# Altium PCB dental-uint-pedal v1_0.PcbDoc
Units mm, origin at the board's own origin, x right, y up, seen from the top; angles counter-clockwise.
Board outline 48.02 x 53.5 mm, 2 copper layers (Top Layer, Bottom Layer), stack 0.571 mm thick; 57 components, 41 nets, 198 pads, 201 vias.
Unrouted connection lines stored in the file: 1.
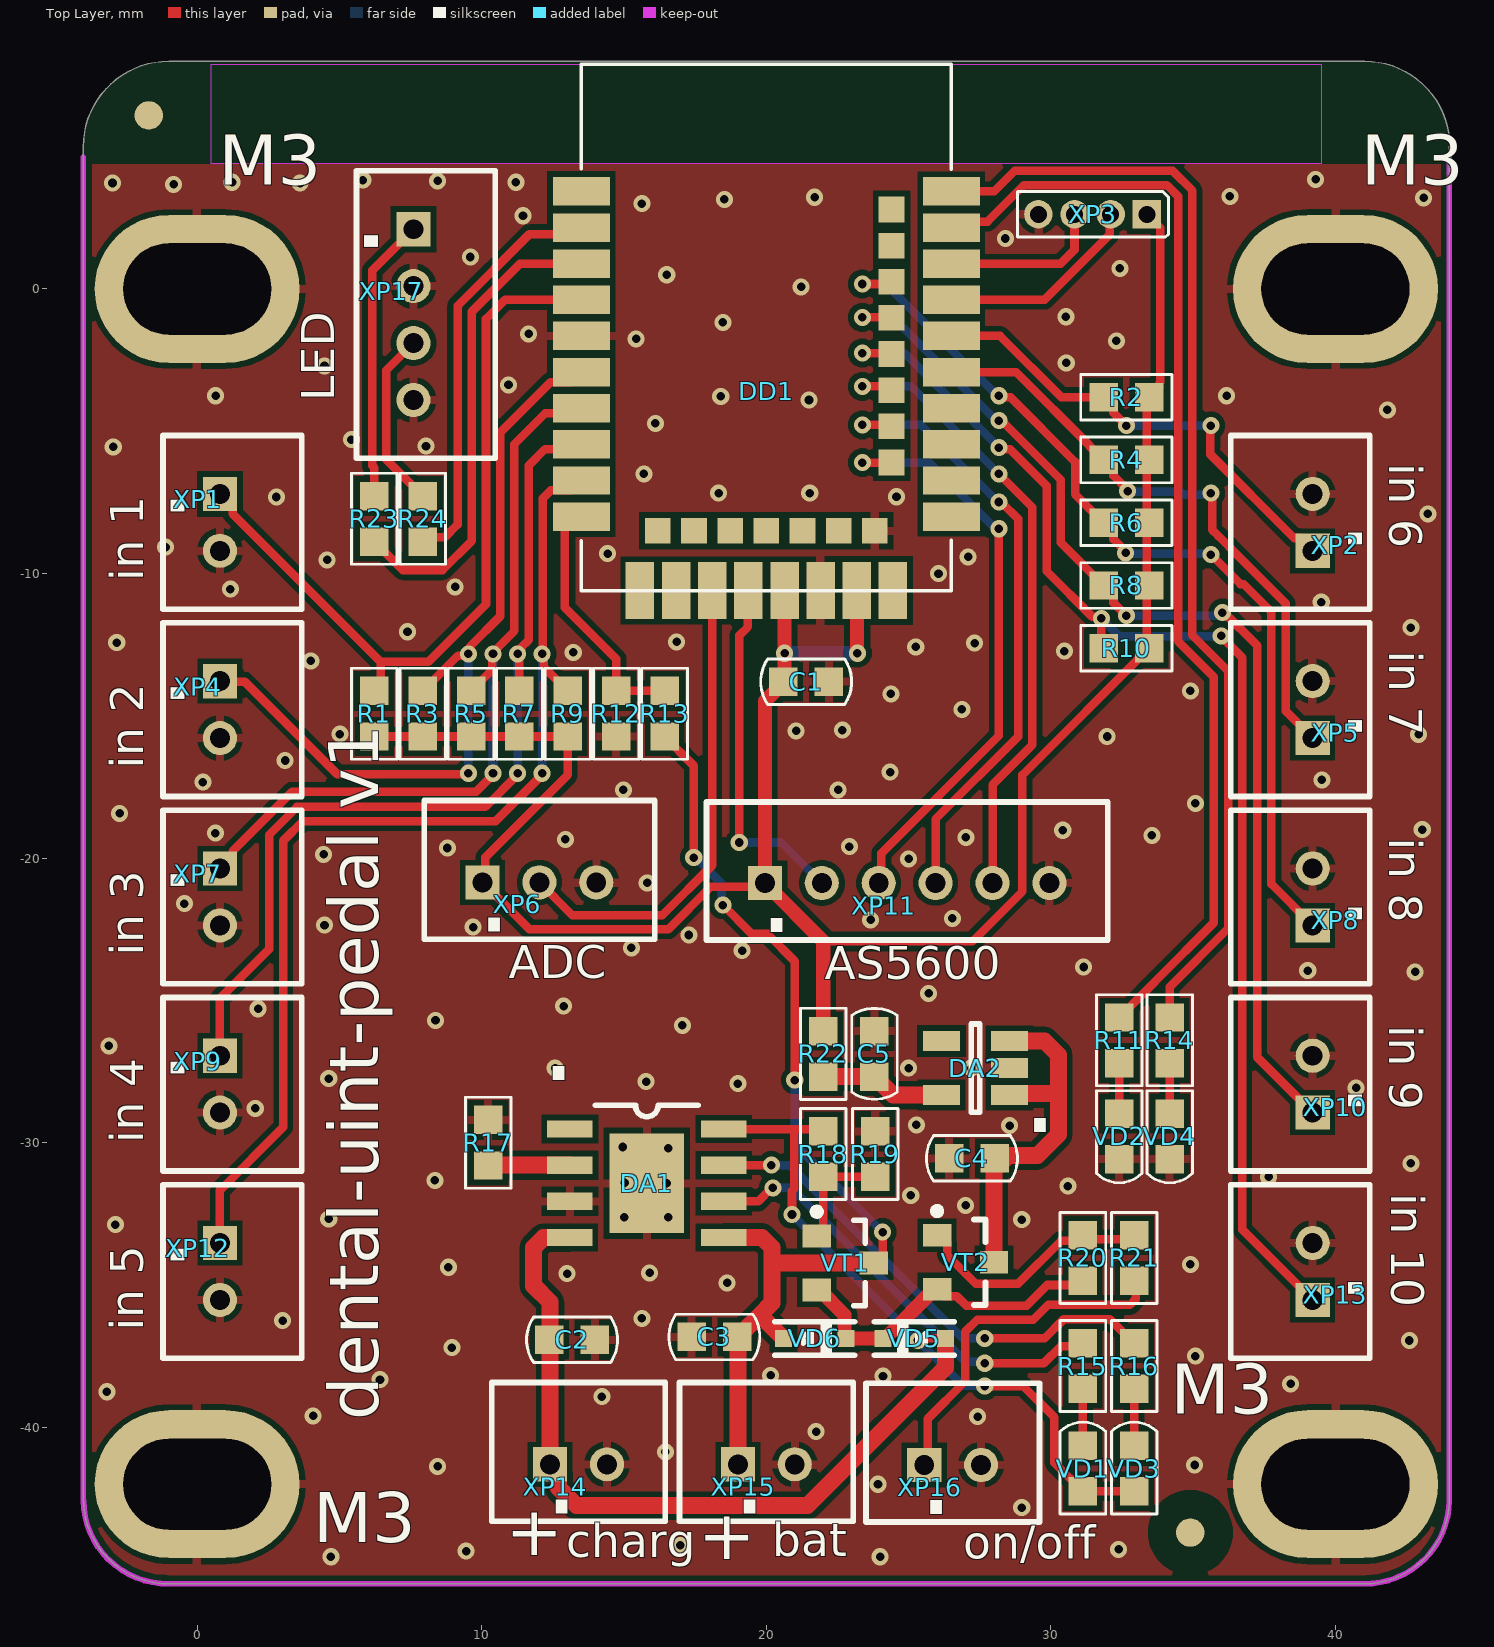
[diagram p0: Top Layer view]
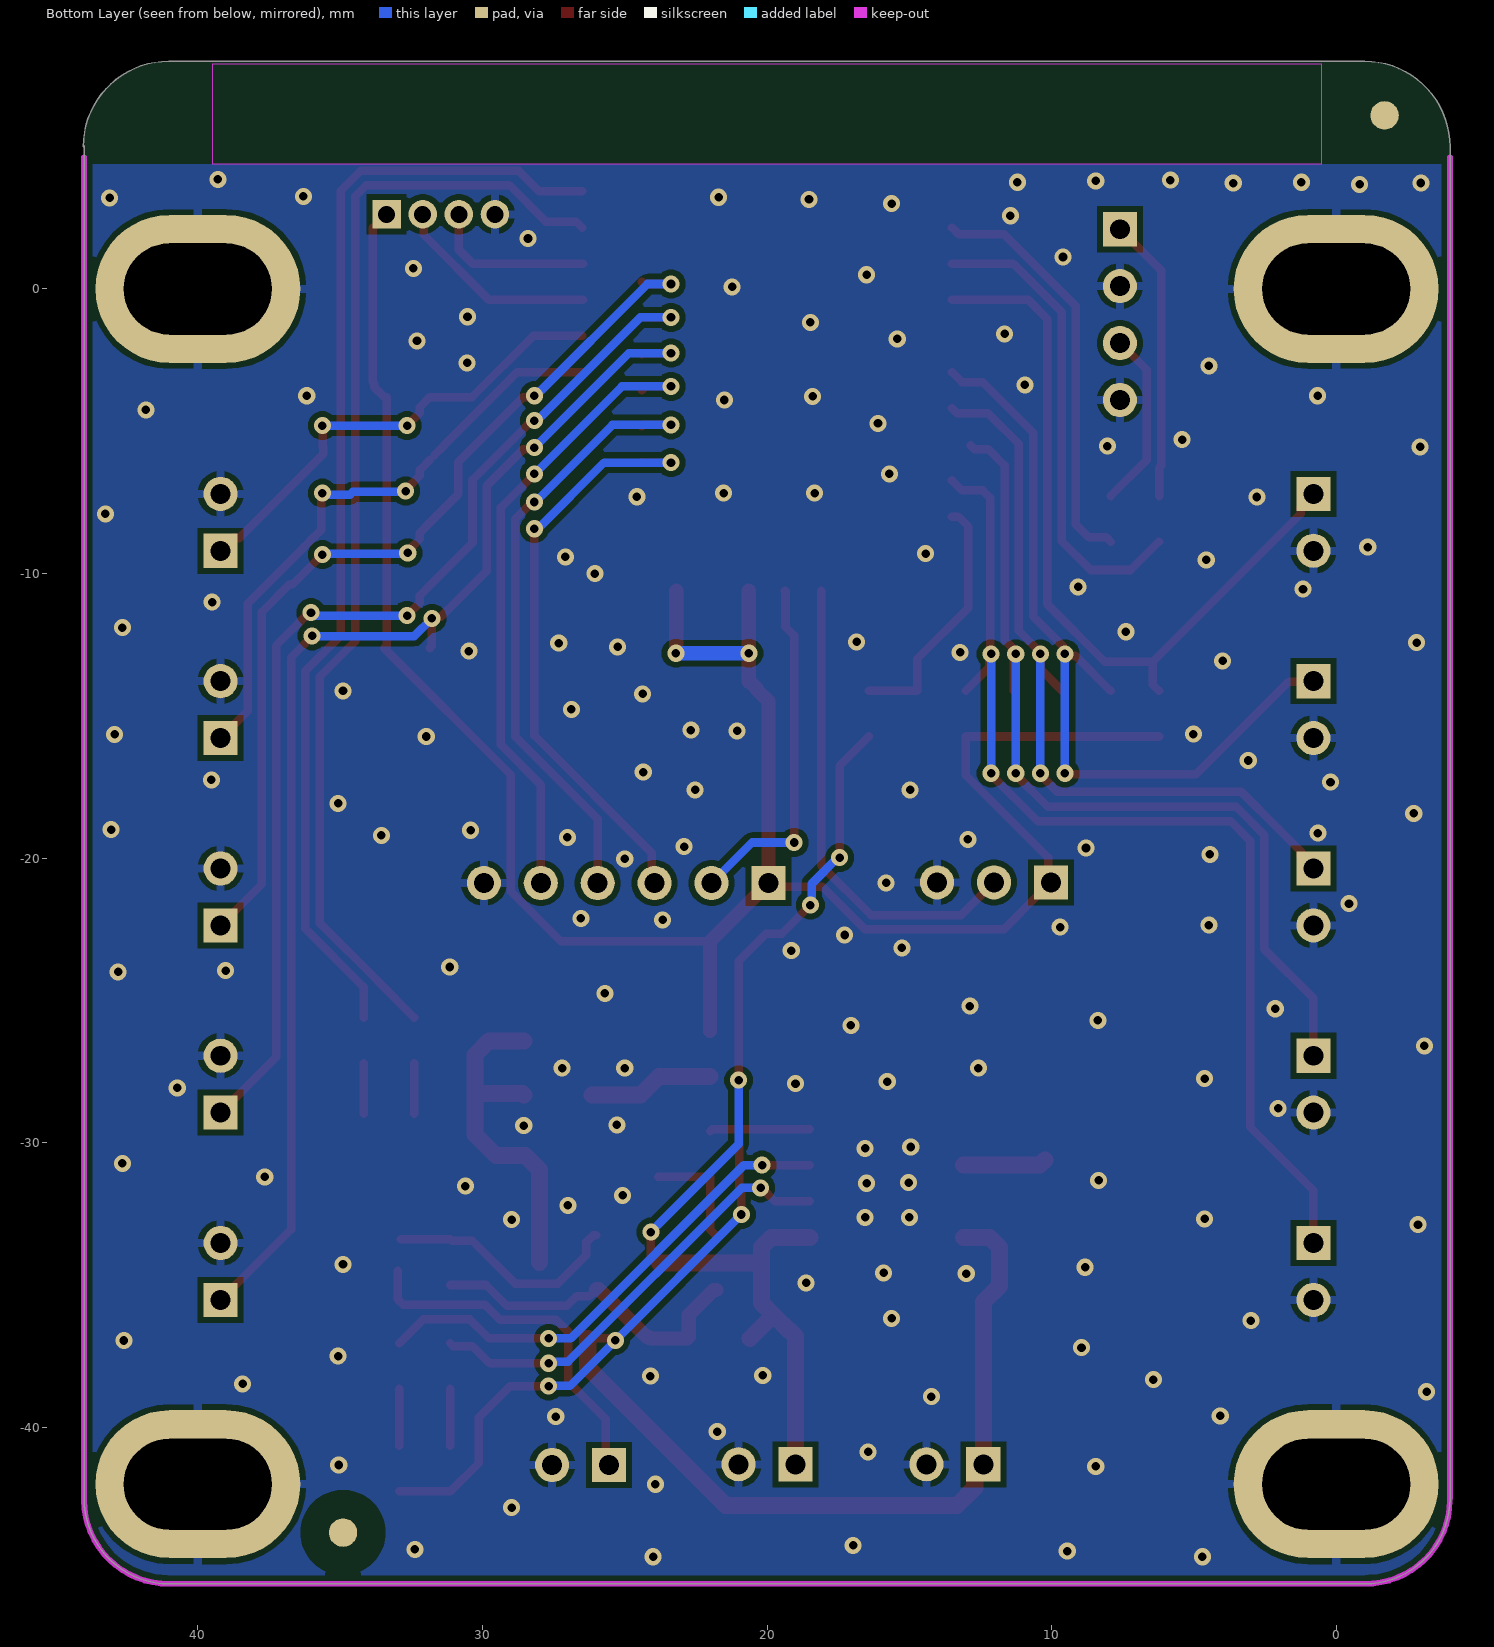
[diagram p1: Bottom Layer view, seen from below]
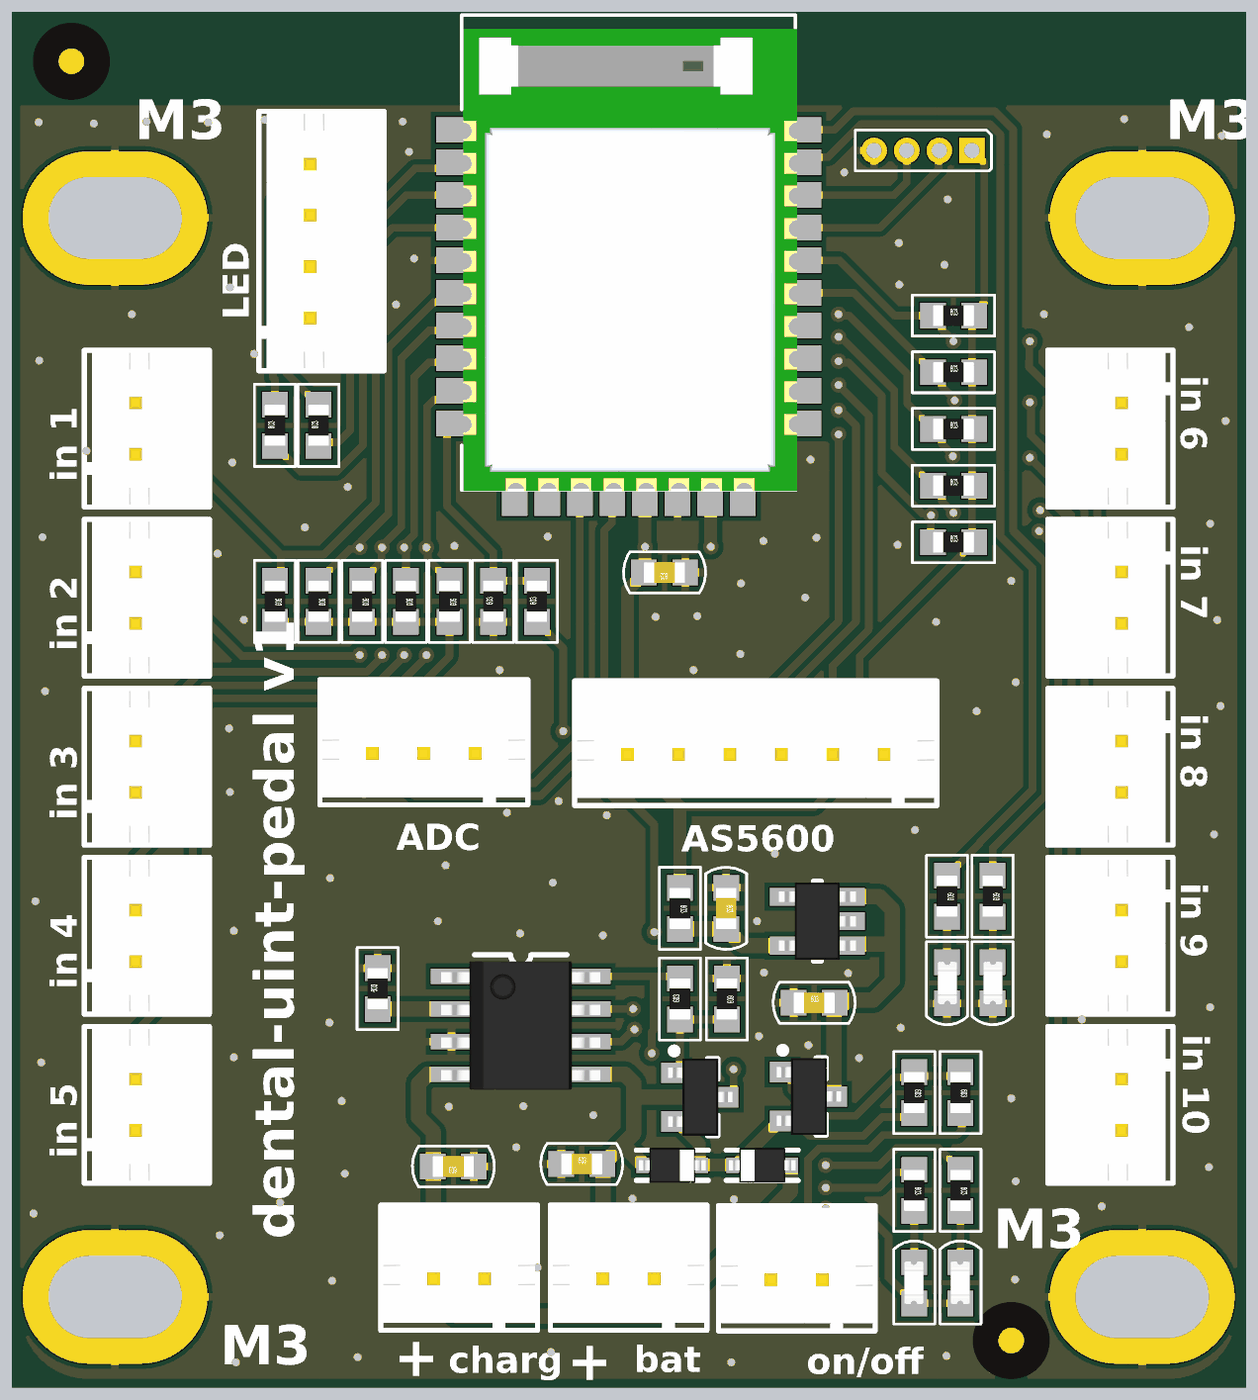
[diagram p2: 3D render of the assembled board from above, using the file's embedded part models]

## Layer stack, top to bottom
Top Solder: solder mask 0.0102, Solder Resist, Dk 3.5
Top Layer: signal copper 0.0356
Dielectric1: core 0.5, FR-4, Dk 4.8
Bottom Layer: signal copper 0.0356
Bottom Solder: solder mask 0.0102, Solder Resist, Dk 3.5

## Board outline
-4,-42.5 -4,5 cw(c-1,5) -1,8 41.025,8 cw(c41.025,5) 44.025,5 44,5.025 44,-42.575 44,-42.5 cw(c41,-42.5) 41,-45.5 -1,-45.5 cw(c-1,-42.5)

## Design rules (kind name [scope] priority, off if disabled: settings)
Clearance "Stitching No Net" [IsStitchingVia and InNet('No Net') vs (IsVia and (Not IsStitchingVia)) Or IsPad] p1: gap=0.127 ignorepadtopadclearanceinfootprint=FALSE except(0: Arc-Hole Track-Hole SMDPad-Hole THPad-Hole Via-Hole Fill-Hole Poly-Hole Region-Hole Text-Hole)
Clearance Clearance_2 [(InPadClass('New Class 2')) vs (InPadClass('New Class 3'))] p2: gap=0.15 ignorepadtopadclearanceinfootprint=FALSE except(0: Arc-Hole Track-Hole SMDPad-Hole THPad-Hole Via-Hole Fill-Hole Poly-Hole Region-Hole Text-Hole)
Clearance Clearance_1 [InPadClass('Reper')] p3: gap=1 ignorepadtopadclearanceinfootprint=FALSE except(0: Arc-Hole Track-Hole SMDPad-Hole THPad-Hole Via-Hole Fill-Hole Poly-Hole Region-Hole Text-Hole)
Clearance [All] p4: gap=0.2 ignorepadtopadclearanceinfootprint=FALSE except(0: Arc-Hole Track-Hole SMDPad-Hole THPad-Hole Via-Hole Fill-Hole Poly-Hole Region-Hole Text-Hole)
HoleSize [All] p1: absolutevalues=TRUE maxlimit=7 minlimit=0.025 maxpercent=80.000 minpercent=20.000
HoleToHoleClearance [All] p1: gap=0.1 allowstackedmicrovias=TRUE
Length [InNetClass('SD_net_class')] p1: maxlimit=27 minlimit=26
MatchedLengths [InNetClass('SD_net_class')] p1: tolerance=1 checknetsindiffpair=FALSE checkdiffpairvsdiffpair=TRUE checkxsignals=TRUE checkothers=TRUE
MinimumSolderMaskSliver [All] p1 off: minsoldermaskwidth=0.1
PlaneClearance [All] p1: clearance=0.2
PlaneConnect [All] p1: planeconnectstyle=Direct reliefexpansion=0.2 reliefentries=4 reliefconductorwidth=0.2 reliefairgap=0.2
PolygonConnect Polygon_24v [InNamedPolygon('24V_L01_P000')] p1: connectstyle=Direct reliefconductorwidth=0.2 reliefentries=4 polygonreliefangle="90 Angle" airgapwidth=0.3
PolygonConnect PolygonConnectCoponent [(InPadClass('New Class'))] p2: connectstyle=Relief reliefconductorwidth=0.3 reliefentries=4 polygonreliefangle="90 Angle" airgapwidth=0.2
PolygonConnect PolygonConnectALL [All] p3: connectstyle=Direct reliefconductorwidth=0.3 reliefentries=2 polygonreliefangle="45 Angle" airgapwidth=0.7
RoutingVias [All] p1: holewidth=0.3 width=0.6 viastyle="Through Hole" minholewidth=0.3 minwidth=0.6 maxholewidth=0.3 maxwidth=0.6
SilkToSilkClearance [All] p1 off: silktosilkclearance=0.254
SilkToSolderMaskClearance [IsPad] p1 off: minsilkscreentomaskgap=0.254 clearancetoexposedcopper=TRUE
SolderMaskExpansion [All] p1: expansion=0.05 istentingtop=FALSE
ViasUnderSMD [All] p1: allowed=FALSE
Width [All] p1: maxlimit=1.5 minlimit=0.2 preferedwidth=0.2
23 further rules are at their usual default settings.

## Classes and differential pairs
pad class "Mounting Holes": Free-M0
pad class "New Class": C1-1 C1-2 C2-1 C2-2 C3-1 C3-2 C4-1 C4-2 C5-1 C5-2 DA1-1 DA1-2 DA1-3 DA1-4 DA1-5 DA1-6 DA1-7 DA1-8 DA1-9 DA2-1 DA2-2 DA2-3 DA2-4 DA2-5 DD1-1 DD1-2 DD1-3 DD1-4 DD1-5 DD1-6 DD1-7 DD1-8 DD1-9 DD1-10 DD1-11 DD1-12 DD1-13 DD1-14 DD1-15 DD1-16 DD1-17 DD1-18 DD1-19 DD1-20 DD1-21 DD1-22 DD1-23 DD1-24 DD1-25 DD1-26 DD1-27 DD1-28 DD1-29 DD1-30 DD1-31 DD1-32 DD1-33 DD1-34 DD1-35 DD1-36 DD1-37 DD1-38 DD1-39 DD1-40 DD1-41 DD1-42 DD1-43 Free-M0 R1-1 R1-2 R2-1 R2-2 R3-1 R3-2 R4-1 R4-2 R5-1 R5-2 R6-1 R6-2 R7-1 R7-2 R8-1 R8-2 R9-1 R9-2 R10-1 R10-2 R11-1 R11-2 R12-1 R12-2 R13-1 R13-2 R14-1 R14-2 R15-1 R15-2 R16-1 R16-2 R17-1 R17-2 R18-1 R18-2 R19-1 R19-2 R20-1 R20-2 R21-1 R21-2 R22-1 R22-2 R23-1 R23-2 R24-1 R24-2 VD1-1 VD1-2 VD2-1 VD2-2 VD3-1 VD3-2 VD4-1 VD4-2 VD5-1 VD5-2 VD6-1 VD6-2 VT1-1 VT1-2 VT1-3 VT2-1 VT2-2 VT2-3 XP1- XP1-1 XP1-2 XP2- XP2-1 XP2-2 XP3-1 XP3-2 XP3-3 XP3-4 XP4- XP4-1 XP4-2 XP5- XP5-1 XP5-2 XP6- XP6-1 XP6-2 XP6-3 XP7- XP7-1 XP7-2 XP8- XP8-1 XP8-2 XP9- XP9-1 XP9-2 XP10- XP10-1 XP10-2 XP11- XP11-1 XP11-2 XP11-3 XP11-4 XP11-5 XP11-6 XP12- XP12-1 XP12-2 XP13- XP13-1 XP13-2 XP14- XP14-1 XP14-2 XP15- XP15-1 XP15-2 XP16- XP16-1 XP16-2 XP17- XP17-1 XP17-2 XP17-3 XP17-4
pad class Reper: Free-RepPoint2

## Components (designator, comment, footprint, x,y, rotation, side; value= is the part's Value field where it differs from the comment)
C1 "CL10A475KA8NQNC" CC_0603 21.4,-13.8 r180 top value=4.7uF
C2 "CL10A106KP8NNNC" CC_0603 13.175,-36.925 r180 top value=10uF
C3 "CL10A475KA8NQNC" CC_0603 18.175,-36.825 r0 top value=4.7uF
C4 "CL10A475KA8NQNC" CC_0603 27.225,-30.55 r0 top value=4.7uF
C5 "CL10A475KA8NQNC" CC_0603 23.8,-26.875 r270 top value=4.7uF
DA1 "TP4056" SOIC-8N 15.8,-31.425 r0 top
DA2 "LP5907MF-3.3" SOT-23-5 27.35,-27.375 r180 top
DD1 "E73-2G4M08S1E" E73-2G4M08S1C 20,-1.6 r0 top
R1 "AC0603FR-0710KL" RC_0603 6.225,-14.925 r270 top value=10K
R2 "AC0603FR-0710KL" RC_0603 32.65,-3.8 r0 top value=10K
R3 "AC0603FR-0710KL" RC_0603 7.925,-14.925 r270 top value=10K
R4 "AC0603FR-0710KL" RC_0603 32.65,-6.006 r0 top value=10K
R5 "AC0603FR-0710KL" RC_0603 9.625,-14.925 r270 top value=10K
R6 "AC0603FR-0710KL" RC_0603 32.65,-8.213 r0 top value=10K
R7 "AC0603FR-0710KL" RC_0603 11.325,-14.925 r270 top value=10K
R8 "AC0603FR-0710KL" RC_0603 32.65,-10.419 r0 top value=10K
R9 "AC0603FR-0710KL" RC_0603 13.025,-14.925 r270 top value=10K
R10 "AC0603FR-0710KL" RC_0603 32.65,-12.625 r0 top value=10K
R11 "AC0603FR-071KL" RC_0603 32.4,-26.4 r270 top value=1K
R12 "AC0603JR-0716KL" RC_0603 14.725,-14.925 r90 top value=16K
R13 "AC0603FR-07100KL" RC_0603 16.425,-14.925 r90 top value=100K
R14 "AC0603FR-071KL" RC_0603 34.175,-26.4 r270 top value=1K
R15 "AC0603FR-0710KL" RC_0603 31.125,-37.85 r270 top value=10K
R16 "AC0603FR-0710KL" RC_0603 32.925,-37.85 r270 top value=10K
R17 "AC0603FR-072KL" RC_0603 10.225,-30 r90 top value=2K
R18 "RC0603FR-07100RL" RC_0603 22,-30.4 r90 top value=100
R19 "AC0603FR-0710KL" RC_0603 23.825,-30.4 r270 top value=10K
R20 "AC0603FR-0710KL" RC_0603 31.125,-34.05 r270 top value=10K
R21 "RC0603FR-07100RL" RC_0603 32.925,-34.05 r270 top value=100
R22 "AC0603FR-070RL" RC_0603 22,-26.875 r270 top value=0
R23 "AC0603FR-071KL" RC_0603 6.225,-8.075 r90 top value=1K
R24 "AC0603FR-071KL" RC_0603 7.925,-8.075 r90 top value=1K
VD1 "0603PGUC" LED_0603 31.125,-41.45 r90 top
VD2 "0603BUC" LED_0603 32.4,-29.775 r270 top
VD3 "0603RHC" LED_0603 32.925,-41.45 r90 top
VD4 "0603RHC" LED_0603 34.175,-29.775 r270 top
VD5 "BAT20J" SOD-323 24.1,-36.875 r0 top
VD6 "BAT20J" SOD-323 22.8,-36.875 r180 top
VT1 "FDN304P" SOT-23-3 22.775,-34.225 r0 top
VT2 "FDN304P" SOT-23-3 27,-34.2 r0 top
XP1 "KLS1-XL1-2.00-02-S" KLS1-XL1-2.00-02-S 0.8,-8.2 r270 top locked
XP2 "KLS1-XL1-2.00-02-S" KLS1-XL1-2.00-02-S 39.2,-8.2 r90 top
XP3 "1x5x1.27" XT_1x4x1,27 30.83,2.625 r180 top
XP4 "KLS1-XL1-2.00-02-S" KLS1-XL1-2.00-02-S 0.8,-14.781 r270 top
XP5 "KLS1-XL1-2.00-02-S" KLS1-XL1-2.00-02-S 39.2,-14.781 r90 top
XP6 "KLS1-XL1-2.00-03-S" KLS1-XL1-2.00-03-S 12.025,-20.85 r0 top
XP7 "KLS1-XL1-2.00-02-S" KLS1-XL1-2.00-02-S 0.8,-21.362 r270 top
XP8 "KLS1-XL1-2.00-02-S" KLS1-XL1-2.00-02-S 39.2,-21.362 r90 top
XP9 "KLS1-XL1-2.00-02-S" KLS1-XL1-2.00-02-S 0.8,-27.944 r270 top
XP10 "KLS1-XL1-2.00-02-S" KLS1-XL1-2.00-02-S 39.2,-27.944 r90 top
XP11 "KLS1-XL1-2.00-06-S" KLS1-XL1-2.00-06-S 24.95,-20.875 r0 top
XP12 "KLS1-XL1-2.00-02-S" KLS1-XL1-2.00-02-S 0.8,-34.525 r270 top
XP13 "KLS1-XL1-2.00-02-S" KLS1-XL1-2.00-02-S 39.2,-34.525 r90 top
XP14 "KLS1-XL1-2.00-02-S" KLS1-XL1-2.00-02-S 13.4,-41.3 r0 top
XP15 "KLS1-XL1-2.00-02-S" KLS1-XL1-2.00-02-S 20,-41.3 r0 top
XP16 "KLS1-XL1-2.00-02-S" KLS1-XL1-2.00-02-S 26.55,-41.325 r0 top
XP17 "KLS1-XL1-2.00-04-x" KLS1-XL1-2.00-04-S 7.6,-0.9 r270 top

## Footprints (in the part's own frame and the unit in brackets; to place one, negate y for a bottom-side part, rotate by r counter-clockwise, add the part's x,y. Pads: shape width x height; smd on the part's side, far side on the other; paste and mask are expansions set on the pad)
CC_0603 [mm]
  rect 1x1 smd: 1(-0.8,0) 2(0.8,0)
  silkscreen extent -1.6,-0.8 1.6,0.8, body extent -0.8,-0.4 0.8,0.4, height 0.3
E73-2G4M08S1C [mm]
  rect 2x1 smd: 1(-6.5,5.03) 2(-6.5,3.76) 3(-6.5,2.49) 4(-6.5,1.22) 5(-6.5,-0.05) 6(-6.5,-1.32) 7(-6.5,-2.59) 8(-6.5,-3.86) 9(-6.5,-5.13) 10(-6.5,-6.4) 26(6.5,-6.4) 27(6.5,-5.13) 29(6.5,-3.86) 31(6.5,-2.59) 33(6.5,-1.32) 35(6.5,-0.05) 37(6.5,1.22) 39(6.5,2.49) 41(6.5,3.76) 43(6.5,5.03)
  rect 1x2 smd: 11(-4.44,-9) 13(-3.17,-9) 15(-1.9,-9) 17(-0.63,-9) 19(0.64,-9) 21(1.91,-9) 23(3.18,-9) 25(4.45,-9)
  rect 0.9x0.9 smd: 12(-3.81,-6.9) 14(-2.54,-6.9) 16(-1.27,-6.9) 18(0,-6.9) 20(1.27,-6.9) 22(2.54,-6.9) 24(3.81,-6.9) 28(4.4,-4.495) 30(4.4,-3.225) 32(4.4,-1.955) 34(4.4,-0.685) 36(4.4,0.585) 38(4.4,1.855) 40(4.4,3.125) 42(4.4,4.395)
  Keep-Out Layer region: 19.5,6 -19.5,6 -19.5,9.5 19.5,9.5
  silkscreen extent -6.5,-9 6.5,9.5, body extent -6.44,-9.03 6.56,8.97, height 3.1
KLS1-XL1-2.00-02-S [mm]
  rect 1.2x1.2 hole 0.7: 1(-1,0)
  round 1.2 hole 0.7: 2(1,0)
  round 0.5 on Mech1: ""(-2.625,-1.575)
  silkscreen extent -3.05,-2 3.05,2.88, body extent -2.95,-1.9 2.95,2.8, height 6
KLS1-XL1-2.00-03-S [mm]
  rect 1.2x1.2 hole 0.7: 1(-2,0)
  round 1.2 hole 0.7: 2(0,0) 3(2,0)
  round 0.5 on Mech1: ""(-3.55,-1.55)
  silkscreen extent -4.05,-2 4.05,2.88, body extent -3.95,-1.9 3.95,2.8, height 6
KLS1-XL1-2.00-04-S [mm]
  rect 1.2x1.2 hole 0.7: 1(-3,0)
  round 1.2 hole 0.7: 2(-1,0) 3(1,0) 4(3,0)
  round 0.5 on Mech1: ""(-4.625,-1.575)
  silkscreen extent -5.05,-2 5.05,2.88, body extent -4.95,-1.9 4.95,2.8, height 6
KLS1-XL1-2.00-06-S [mm]
  rect 1.2x1.2 hole 0.7: 1(-5,0)
  round 1.2 hole 0.7: 2(-3,0) 3(-1,0) 4(1,0) 5(3,0) 6(5,0)
  round 0.5 on Mech1: ""(-6.65,-1.6)
  silkscreen extent -7.05,-2 7.05,2.85, body extent -6.95,-1.9 6.95,2.8, height 6
LED_0603 [mm]
  rect 1x1 smd: 1(-0.8,0) 2(0.8,0)
  silkscreen extent -1.6,-0.8 1.63,0.8, body extent -0.82,-0.35 0.82,0.38, height 0.68
RC_0603 [mm]
  rect 1x1 smd: 1(-0.8,0) 2(0.8,0)
  silkscreen extent -1.6,-0.8 1.6,0.8, body extent -0.8,-0.4 0.8,0.4, height 0.3
SOD-323 [mm]
  rect 0.6x0.6 smd: 1(2.2,0) 2(0,0)
  silkscreen extent -0.3,-0.59 2.5,0.59, body extent -0.2,-0.67 2.4,0.68, height 1.1
SOIC-8N [mm]
  rect 1.6x0.61 smd: 1(-2.7,1.905) 2(-2.7,0.635) 3(-2.7,-0.635) 4(-2.7,-1.905) 5(2.7,-1.905) 6(2.7,-0.635) 7(2.7,0.635) 8(2.7,1.905)
  rect 2.62x3.51 smd: 9(0,0)
  silkscreen extent -1.8,2.34 1.8,2.74, body extent -3.1,-2.51 3.1,2.49, height 1.75
SOT-23-3 [mm]
  rect 1x0.8 smd: 1(-1,0.95) 2(-1,-0.95) 3(1,0)
  silkscreen extent -1.12,-1.5 0.7,1.92, body extent -1.23,-1.5 1.27,1.5, height 1
SOT-23-5 [mm]
  rect 1.3x0.7 smd: 1(-1.2,0.95) 2(-1.2,0) 3(-1.2,-0.95) 4(1.2,-0.95) 5(1.2,0.95)
  silkscreen extent -0.15,-1.55 0.15,1.55, body extent -1.5,-1.5 1.5,1.5, height 1.5
XT_1x4x1,27 [mm]
  rect 1x1 hole 0.6: 1(-2.54,0)
  round 1 hole 0.6: 2(-1.27,0) 3(0,0) 4(1.27,0)
  silkscreen extent -3.3,-0.8 2,0.8

## Part data
C1 C3 C4 C5: library part C, "Cap Ceramic, 0603, 4.7u, 10%, 25V, X5R (Sumsung)", type=CL10A475KA8NQNC
C2: library part C, "Cap Ceramic, 0603, 10u, 10%, 16V, X5R (Sumsung)", type=CL10A106KP8NNNC
DA1: "Battery Management", ComponentLink1Description=datasheet, ComponentLink1URL=https://dlnmh9ip6v2uc.cloudfront.net/datasheets/Prototyping/TP4056.pdf, type=TP4056
DA2: "LDO, SOT-23-5, 3.3v, 0.25А, @TI", ComponentLink1Description="New link", ComponentLink1URL=https://cdn.compacttool.ru/downloads/LP5907_TexasInstruments-Datasheet.pdf, type=LP2981
DD1: "nRF52833", HelpURL=https://www.minew.com/product/ms88sf2-1y40air/, type=MS88SF2
R1 R2 R3 R4 R5 R6 R7 R8 R9 R10 R15 R16 R19 R20: library part R, "Res, 0603, 10K, 1%, 0.25W (ф. Yageo)", power=0.25W, type=AC0603FR-0710KL
R11 R14 R23 R24: library part R, "Res, 0603, 1K 1%, 0.25W (ф. Yageo)", power=0.25W, type=AC0603FR-071KL
R12: library part R, "Res, 0603, 16K, 1%, 0.25W (ф. Yageo)", power=0.25W, type=AC0603JR-0716KL
R13: library part R, "Res, 0603, 100K, 1%, 0.25W (ф. Yageo)", power=0.25W, type=AC0603FR-07100KL
R17: library part R, "Res, 0603, 2K, 1%, 0.25W (ф. Yageo)", power=0.25W, type=AC0603FR-072KL
R18 R21: library part R, "Res, 0603, 100, 1%, 0.25W (ф. Yageo)", power=0.25W, type=RC0603FR-07100RL
R22: library part R, "Res, 0603, 0, 1%, 0.25W (ф. Yageo)", power=0.25W, type=AC0603FR-070RL
VD1: library part LED, "Led, 0603, GREEN, 20mA, 125, 140MCD, CPMELEC"
VD2: library part LED, "Led, 0603, BLUE, 20mA, 125, 140MCD, CPMELEC"
VD3 VD4: library part LED, "Led, 0603, RED, 20mA, 125, 140MCD, CPMELEC"
VD5 VD6: library part D_schottky
VT1 VT2: library part IRLML6402, "HEXFET Power MOSFET", type=FDN304P
XP1 XP2 XP4 XP5 XP7 XP8 XP9 XP10 XP12 XP13 XP14 XP15 XP16: library part KLS1-XL1-2.00-02-x, "2.0mm, 2pin, KLS", ComponentLink1Description=link, ComponentLink1URL=https://klsele.com/admin/product_upload/20220615100315L-KLS1-XL1-2.00.pdf
  XP1: name=IN_1
  XP2: name=IN_6
  XP4: name=IN_2
  XP5: name=IN_7
  XP7: name=IN_3
  XP8: name=IN_8
  XP9: name=IN_4
  XP10: name=IN_9
  XP12: name=IN_5
  XP13: name=IN_10
  XP14: name=CHARG
  XP15: name=BAT
  XP16: name=OFF/ON
XP3: library part XT_1x4x1_27, type=1x5x1.27
XP6: library part KLS1-XL1-2.00-03-x, "2.0mm, 3pin, KLS", ComponentLink1Description=link, ComponentLink1URL=https://klsele.com/admin/product_upload/20220615100315L-KLS1-XL1-2.00.pdf, name=ADC
XP11: library part KLS1-XL1-2.00-06-x, "2.0mm, 6pin, KLS", ComponentLink1Description=link, ComponentLink1URL=https://klsele.com/admin/product_upload/20220615100315L-KLS1-XL1-2.00.pdf, name=AS5600
XP17: "2.0mm, 4pin, KLS", ComponentLink1Description=link, ComponentLink1URL=https://klsele.com/admin/product_upload/20220615100315L-KLS1-XL1-2.00.pdf, name="OUT LED"

## Free pads (board coordinates)
  oval 7.2x5.2 hole 3.2 slot 5.2 at 0 deg unplated: M0(0,-42) M0(0,0) M0(40,-42) M0(40,0)
  round 1 all layers, no hole paste+1 mask+1: RepPoint2(-1.7,6.1) RepPoint2(34.9,-43.7)

## Via types
v1: diameter 0.6, hole 0.3, Top Layer to Bottom Layer, tented both sides, 201 vias

## Nets (pads, with @x,y where several pads share a name; then routed paths per layer and width w, separated by ;. In a path a pad name is that pad's centre, name@x,y a point inside that pad or via, vN(x,y) a via of type N, cw(c..) or ccw(c..) an arc to the next point about the centre after c; other vN are vias at no path point)
3.3V: C1.2 DD1.19 DD1.23 R1.2 R2.2 R3.2 R4.2 R5.2 R6.2 R7.2 R8.2 R9.2 R10.2 R22.1 XP3.1 XP6.1 XP11.1 | length 79.6
  Top Layer w0.3: R1.2 R3.2 R5.2 R7.2 R9.2 13.025,-17.075 10.124,-19.976 10.124,-20.751 XP6.1 10.475,-21.3 11.675,-22.5 16.557,-22.5 18.057,-21 19.825,-21 XP11.1 ; 22,-22.925 27.243,-22.925 29,-21.169 29,-17.075 R10.2 33.37,-12.545 33.37,-10.419 33.37,-8.213 33.37,-6.006 R2.2@33.37,-3.8 ; XP3.1 33.85,2.145 33.85,-3.274 33.8,-3.324 33.8,-3.45 R2.2
  Top Layer w0.5: DD1.19 v1(20.64,-12.8) 20.64,-13.8 C1.2 20.35,-14.05 20.35,-14.09 19.95,-14.49 XP11.1 22,-22.925 R22.1 ; DD1.23 23.19,-10.61 23.19,-12.79 v1(23.2,-12.8)
  Bottom Layer w0.5: v1(20.64,-12.8) v1(23.2,-12.8)
ADC: DD1.15 XP6.2 | length 16.9
  Top Layer w0.3: XP6.2 13.175,-22 16.35,-22 18.1,-20.25 DD1.15
DIR_AS: DD1.17 XP11.2 | length 12.5
  Top Layer w0.3: v1(19.05,-19.45) 19.05,-12.175 19.351,-11.874 19.351,-10.619 DD1.17
  Bottom Layer w0.3: v1(19.05,-19.45) 20.525,-19.45 XP11.2
GND: C1.1 C2.1 C3.1 C4.1 C5.1 DA1.3 DA1.9 DA2.2 DD1.5 DD1.21 DD1.24 pad.M0 R12.1 R17.2 R19.1 VD2.2 VD4.2 XP1.2 XP2.2 XP3.4 XP4.2 XP5.2 XP6.3 XP7.2 XP8.2 XP9.2 XP10.2 XP11.6 XP12.2 XP13.2 XP14.2 XP15.2 XP16.2 XP17.2 XP17.4
  other v1: 4.7,-44.55 24,-44.55 9.45,-44.35 32.377,-44.293 16.975,-44.15 28.975,-42.825 23.925,-42 8.45,-41.375 35.05,-41.325 16.45,-40.863 21.75,-40.15 27.425,-39.625 4.075,-39.6 14.225,-38.925 -3.175,-38.75 38.425,-38.475 6.425,-38.325 24.1,-38.2 20.15,-38.175 35.075,-37.5 8.95,-37.2 42.6,-36.95 3,-36.25 15.625,-36.175 18.625,-34.925 13,-34.6 15.9,-34.575 8.825,-34.375 34.9,-34.275 -2.875,-32.875 28.975,-32.7 4.625,-32.675 15,-32.625 16.55,-32.625 27,-32.2 25.075,-31.85 30.6,-31.525 16.5,-31.425 15.025,-31.4 8.35,-31.325 37.65,-31.2 42.65,-30.725 16.55,-30.2 14.95,-30.15 28.55,-29.4 25.275,-29.375 2.041,-28.793 40.725,-28.075 19,-27.925 15.775,-27.85 4.625,-27.75 12.575,-27.375 25,-27.375 27.2,-27.375 -3.1,-26.6 17.05,-25.875 8.375,-25.7 2.141,-25.293 12.875,-25.2 25.7,-24.75 42.8,-24 39.025,-23.95 31.15,-23.825 19.15,-23.25 15.262,-23.15 17.276,-22.701 9.7,-22.425 4.475,-22.35 23.666,-22.168 26.541,-22.118 -0.45,-21.6 15.816,-20.868 25,-20.025 4.441,-19.868 8.791,-19.643 22.916,-19.593 12.941,-19.343 27.016,-19.268 33.55,-19.2 0.641,-19.118 30.416,-19.018 43.05,-19 -2.725,-18.425 35.075,-18.075 14.975,-17.6 22.525,-17.6 0.2,-17.325 39.525,-17.25 24.35,-16.975 3.091,-16.568 31.975,-15.725 5.016,-15.643 42.925,-15.65 21.05,-15.525 22.675,-15.5 26.875,-14.775 24.375,-14.225 34.9,-14.125 3.991,-13.068 13.216,-12.768 30.475,-12.725 25.25,-12.575 27.319,-12.444 -2.825,-12.425 16.85,-12.4 7.391,-12.043 42.65,-11.9 39.5,-11 1.166,-10.543 9.066,-10.468 26.05,-10 4.566,-9.518 27.088,-9.41 14.425,-9.3 -1.109,-9.068 43.25,-7.9 2.785,-7.31 24.575,-7.3 18.325,-7.175 21.525,-7.175 15.7,-6.5 -2.95,-5.55 8.041,-5.518 5.416,-5.293 16.1,-4.725 41.825,-4.25 21.5,-3.9 18.4,-3.775 0.65,-3.75 36.175,-3.75 10.941,-3.368 4.475,-2.7 30.541,-2.593 32.3,-1.825 15.425,-1.75 11.65,-1.575 18.475,-1.175 30.525,-0.975 21.225,0.075 16.5,0.5 32.425,0.725 9.6,1.125 28.4,1.775 11.45,2.575 15.625,3 18.525,3.15 43.1,3.2 21.7,3.225 36.291,3.257 -0.825,3.675 -2.975,3.725 3.617,3.718 1.225,3.75 11.2,3.75 8.45,3.8 5.825,3.825 39.3,3.85
IN_1: DD1.4 R1.1 XP1.1 | length 27.6
  Top Layer w0.3: XP1.1 1.25,-7.65 1.25,-7.905 6.449,-13.104 ; R1.1 6.449,-13.901 6.449,-13.104 ; DD1.4 10.82,-0.38 10.15,-1.05 10.15,-11.075 8.121,-13.104 6.449,-13.104
IN_2: DD1.6 R3.1 XP4.1 | length 29.1
  Top Layer w0.3: XP4.1@1.25,-13.331 XP4.1 0.818,-13.799 1.674,-13.799 4.925,-17.05 v1@9.594,-17.05 ; R3.1 9.168,-12.882 9.493,-12.882 v1@9.55,-12.825 ; v1(9.531,-12.825) 9.588,-12.768 9.588,-12.562 10.65,-11.5 10.65,-5.045 12.425,-3.27 13.15,-3.27 DD1.6
  Bottom Layer w0.3: v1(9.531,-17.015) v1(9.531,-12.825)
IN_3: DD1.7 R5.1 XP7.1 | length 27.5
  Top Layer w0.3: XP7.1 1.25,-19.912 1.25,-19.75 2.025,-18.975 3.335,-17.665 9.8,-17.665 10.395,-17.07 v1(10.395,-17.015) ; R5.1 10.377,-13.373 10.377,-12.917 v1@10.435,-12.86 ; v1(10.395,-12.825) 10.395,-12.77 11.15,-12.016 11.15,-5.45 12.226,-4.374 13.316,-4.374 DD1.7
  Bottom Layer w0.3: v1(10.395,-17.015) v1(10.395,-12.825)
IN_4: DD1.8 R7.1 XP9.1 | length 31.9
  Top Layer w0.3: XP9.1 0.8,-24.925 2.525,-23.2 2.525,-19.182 3.507,-18.2 10.13,-18.2 11.26,-17.07 v1(11.26,-17.015) ; R7.1 11.325,-12.875 11.382,-12.818 11.382,-12.6 11.65,-12.332 11.65,-6.2 12.226,-5.624 12.718,-5.624 DD1.8@12.843,-5.499
  Bottom Layer w0.3: v1(11.26,-17.015) v1(11.26,-12.825)
IN_5: DD1.9 R9.1 XP12.1 | length 38.2
  Top Layer w0.3: XP12.1 0.8,-31.675 3.025,-29.45 3.025,-19.389 3.714,-18.7 10.495,-18.7 12.124,-17.07 v1(12.124,-17.015) ; v1@12,-12.85 12.048,-12.85 12.182,-12.984 12.182,-13.282 R9.1 ; v1@12.124,-12.845 12.15,-12.82 12.15,-7.355 12.425,-7.08 13.15,-7.08 DD1.9
  Bottom Layer w0.3: v1(12.124,-17.015) v1(12.124,-12.825)
IN_6: DD1.35 R2.1 XP2.1 | length 16.6
  Top Layer w0.3: DD1.35 28.214,-1.65 30.364,-3.8 R2.1 32.2,-4.15 32.2,-4.35 v1(32.65,-4.8) ; v1(35.625,-4.8) 35.606,-4.819 35.606,-5.55 35.599,-5.556 35.599,-5.805 38.544,-8.75 38.75,-8.75 XP2.1
  Bottom Layer w0.3: v1(32.65,-4.8) v1(35.625,-4.8)
IN_7: DD1.33 R4.1 XP5.1 | length 20.9
  Top Layer w0.3: DD1.33 28.777,-2.92 31.35,-5.493 31.35,-5.506 R4.1@31.682,-5.838 ; R4.1 32.2,-6.356 32.2,-6.556 v1@32.697,-7.053 ; v1(35.625,-7.175) 35.668,-7.218 35.668,-8.468 35.885,-8.685 35.894,-8.685 36.275,-9.065 36.275,-9.075 38.25,-11.05 38.25,-14.831 XP5.1
  Bottom Layer w0.3: v1(32.697,-7.1) 32.722,-7.125 34.55,-7.125 34.65,-7.225 35.575,-7.225 v1(35.625,-7.175)
IN_8: DD1.38 R6.1 XP8.1 | length 32.6
  Top Layer w0.3: v1(23.375,0.175) 24.32,0.175 DD1.38 ; v1@28.125,-3.75 28.18,-3.805 28.58,-3.805 30.85,-6.075 30.85,-7.213 R6.1 32.2,-8.563 32.2,-8.789 v1@32.624,-9.213 ; v1(35.625,-9.335) 36.661,-10.371 36.771,-10.371 37.75,-11.35 37.75,-20.912 XP8.1
  Bottom Layer w0.3: v1(23.375,0.175) 24.2,0.175 v1@28.125,-3.75 ; v1@32.655,-9.244 32.716,-9.305 35.595,-9.305 v1(35.625,-9.335)
  other v1: 32.624,-9.275 28.175,-3.75
IN_9: DD1.36 R8.1 XP10.1 | length 38.4
  Top Layer w0.3: v1(23.375,-1) DD1.36@24.385,-1 ; v1@28.147,-4.628 v1(28.175,-4.628) 28.256,-4.628 28.406,-4.778 28.42,-4.778 30.35,-6.708 30.35,-8.919 R8.1 32.2,-10.769 32.2,-11.025 v1(32.65,-11.475) ; v1(36.025,-11.375) 36.092,-11.375 37.25,-12.533 37.25,-26.994 XP10.1
  Bottom Layer w0.3: v1(23.375,-1) 24.456,-1 28.084,-4.628 v1@28.147,-4.628 ; v1(32.65,-11.475) 35.844,-11.475 35.944,-11.375 v1(36.025,-11.375)
IN_10: DD1.34 R10.1 XP13.1 | length 45.3
  Top Layer w0.3: v1(23.375,-2.25) 24.365,-2.25 DD1.34 ; v1(28.175,-5.575) 28.232,-5.632 28.567,-5.632 29.85,-6.915 29.85,-9.914 31.454,-11.518 31.718,-11.518 v1(31.775,-11.575) 31.775,-12.55 R10.1 ; v1(35.986,-12.189) 35.986,-12.211 36.725,-12.95 36.725,-33.05 XP13.1
  Bottom Layer w0.3: v1(23.375,-2.25) 24.85,-2.25 v1(28.175,-5.575) ; v1(31.775,-11.575) 32.4,-12.2 35.975,-12.2 v1(35.986,-12.189)
LED_BLUE: DD1.41 R11.1 | length 39.5
  Top Layer w0.3: DD1.41 26.709,2.369 27.774,2.369 29.055,3.65 34.075,3.65 34.475,3.25 34.475,-12.382 35.725,-13.632 35.725,-22.268 33.675,-24.318 33.675,-24.325 R11.1
LED_RED: DD1.43 R14.1 | length 39.5
  Top Layer w0.3: DD1.43 28.005,3.43 28.725,4.15 34.282,4.15 34.975,3.457 34.975,-12.175 36.225,-13.425 36.225,-22.475 34.175,-24.525 R14.1
NetC3_2: C3.2 DA1.5 R13.1 VD6.1 VT1.3 XP15.1 | length 36.9
  Top Layer w0.3: R13.1 17.45,-16.75 v1(17.45,-19.981) ; v1(18.475,-21.65) 19.489,-22.664 20.044,-22.664 21,-23.62 v1(21,-27.8) ; VT1.3 23.835,-34.225 24.085,-33.975 v1(24.085,-33.14)
  Top Layer w0.6: DA1.5 19.849,-33.33 20.2,-33.681 20.2,-34.225 ; XP15.1 19,-36.8 19.175,-36.625 19.2,-36.625 19.775,-36.05 ; VD6.1 19.775,-36.05 ; VT1.3 20.2,-34.225 ; 19.775,-36.05 20.2,-35.625 20.2,-34.225
  Bottom Layer w0.3: v1(17.45,-19.981) 17.512,-19.981 18.431,-20.9 18.431,-21.606 v1(18.475,-21.65) ; v1(21,-27.8) 21,-30.056 v1(24.085,-33.14)
NetC4_2: C4.2 DA2.1 DA2.3 VT2.3 | length 12.5
  Top Layer w0.6: VT2.3 28,-30.95 28.5,-30.45 29.525,-30.45 30.265,-29.71 30.265,-28.275 ; DA2.1 28.6,-28.275 30.265,-28.275 ; DA2.3 29.775,-26.425 30.265,-26.915 30.265,-28.275
NetC5_2: C5.2 DA2.5 R22.2 | length 4.4
  Top Layer w0.6: R22.2 C5.2 24.45,-28.325 DA2.5
NetDA1_2: DA1.2 R17.1 | length 3
  Top Layer w0.6: R17.1@10.225,-30.6 10.41,-30.785 13.095,-30.785 DA1.2
NetDA1_6: DA1.6 R15.1 | length 15.7
  Top Layer w0.3: DA1.6 19.715,-32.06 20.187,-31.588 v1(20.228,-31.588) ; v1(27.675,-37.75) 29.75,-37.75 30.351,-37.149 31.026,-37.149 R15.1
  Bottom Layer w0.3: v1(20.228,-31.588) 20.888,-31.588 26.993,-37.693 27.618,-37.693 v1(27.675,-37.75)
NetDA1_7: DA1.7 R16.1 | length 17.6
  Top Layer w0.3: DA1.7 v1(20.175,-30.79) ; v1(27.675,-36.875) 29.775,-36.875 30.45,-36.2 32.075,-36.2 R16.1
  Bottom Layer w0.3: v1(20.175,-30.79) 20.815,-30.79 26.9,-36.875 v1(27.675,-36.875)
NetR11_2: R11.2 VD2.1 | length 1.8
  Top Layer w0.3: VD2.1 R11.2
NetR14_2: R14.2 VD4.1 | length 1.8
  Top Layer w0.3: VD4.1 R14.2
NetR15_2: R15.2 VD1.2 | length 2
  Top Layer w0.3: VD1.2 R15.2
NetR16_2: R16.2 VD3.2 | length 2
  Top Layer w0.3: VD3.2 R16.2
NetR18_1: R18.1 R19.2 VT1.1 | length 4
  Top Layer w0.3: VT1.1 22,-33.05 R18.1 R19.2
NetR20_1: R20.1 R21.1 VT2.1 | length 8.5
  Top Layer w0.3: VT2.1 26.1,-33.25 26.35,-33.5 26.35,-33.945 27.355,-34.95 28.85,-34.95 30.351,-33.449 31.076,-33.449 31.125,-33.4 R21.1@32.875,-33.4
NetR20_2: R20.2 VD5.2 VD6.2 VT1.2 VT2.2 | length 11.8
  Top Layer w0.3: VT2.2 26.243,-35.393 26.693,-35.393 27.025,-35.725 29.15,-35.725 29.875,-35 R20.2@31.125,-35
  Top Layer w0.5: VT1.2 21.875,-35.175 22.75,-36.05 22.75,-36.825 VD6.2 VD5.2 24.15,-36.825 24.225,-36.825 25.9,-35.15 VT2.2
NetR21_2: R21.2 XP16.1 | length 12.7
  Top Layer w0.3: XP16.1 25.675,-41.2 25.675,-39.7 26.986,-38.389 26.986,-36.645 27.406,-36.225 29.375,-36.225 29.9,-35.7 32.775,-35.7 32.975,-35.5 R21.2@32.975,-34.5
NetR23_2: R23.2 XP17.1 | length 10
  Top Layer w0.3: R23.2 6.225,-6.282 6.15,-6.207 6.15,0.65 XP17.1
NetR24_2: R24.2 XP17.3 | length 6.3
  Top Layer w0.3: XP17.3 6.65,-2.85 6.65,-6 R24.2
OUT_AS: DD1.32 XP11.5 | length 22.8
  Top Layer w0.3: v1@23.275,-3.425 24.27,-3.425 DD1.32 ; XP11.5 27.95,-17.418 29.35,-16.018 29.35,-7.675 v1(28.175,-6.5)
  Bottom Layer w0.3: v1@23.275,-3.425 25.1,-3.425 v1(28.175,-6.5)
  other v1: 23.375,-3.425
OUT_LED_BLUE: DD1.2 R24.1 | length 14.6
  Top Layer w0.3: R24.1 8.074,-8.726 8.699,-8.726 9.15,-8.275 9.15,-0.593 11.669,1.926 13.266,1.926 DD1.2
OUT_LED_RED: DD1.3 R23.1 | length 16.9
  Top Layer w0.3: R23.1 7.225,-9.875 8.625,-9.875 9.65,-8.85 9.65,-0.8 11.34,0.89 DD1.3
SCL: DD1.30 XP11.4 | length 21.8
  Top Layer w0.3: v1(23.375,-4.775) 24.35,-4.775 DD1.30 ; XP11.4 25.95,-18.625 28.85,-15.725 28.85,-8.082 28.252,-7.485 v1(28.175,-7.485)
  Bottom Layer w0.3: v1(23.375,-4.775) 25.431,-4.775 v1@28.14,-7.485
SDA: DD1.28 XP11.3 | length 21
  Top Layer w0.3: v1@23.3,-6.1 24.395,-6.1 DD1.28 ; XP11.3 24.043,-20.782 24.043,-19.825 28.175,-15.693 v1(28.175,-8.425)
  Bottom Layer w0.3: v1@23.3,-6.1 25.725,-6.1 28.05,-8.425 v1@28.075,-8.425
  other v1: 23.375,-6.1
SWCLK: DD1.39 XP3.3 | length 5.8
  Top Layer w0.3: DD1.39@26.46,0.89 30.34,0.89 30.83,1.38 XP3.3
SWDIO: DD1.37 XP3.2 | length 7.3
  Top Layer w0.3: DD1.37@26.46,-0.38 29.777,-0.38 32.069,1.912 32.069,2.594 XP3.2
V_BAT: DD1.10 R12.2 R13.2 | length 8.9
  Top Layer w0.3: DD1.10 13.275,-8 12.925,-8.35 12.925,-11.2 14.725,-13 R12.2 R13.2
VIN: C2.2 DA1.4 DA1.8 R18.2 VD1.1 VD3.1 VD5.1 XP14.1 | length 51.7
  Top Layer w0.3: DA1.8 20.975,-29.52 ; v1(20.903,-32.522) 20.903,-31.694 20.975,-31.622 20.975,-29.52 ; R18.2 21.92,-29.52 20.975,-29.52 ; v1(25.328,-36.947) 25.409,-36.947 25.481,-36.875 VD5.1 ; v1(27.675,-38.55) 29.025,-38.55 30.125,-39.65 30.125,-41.25 VD1.1 VD3.1
  Top Layer w0.6: DA1.4 13.095,-33.335 12.176,-33.335 11.825,-33.686 11.825,-35.025 12.4,-35.6 XP14.1 12.7,-41.6 12.7,-42.125 13.325,-42.75 21.45,-42.75 26.3,-37.9 VD5.1
  Bottom Layer w0.3: v1(20.903,-32.522) v1(25.328,-36.947) 26.925,-38.544 27.669,-38.544 v1(27.675,-38.55)
pads on no net: DA1.1 DA2.4 DD1.1 DD1.11 DD1.12 DD1.13 DD1.14 DD1.16 DD1.18 DD1.20 DD1.22 DD1.25 DD1.26 DD1.27 DD1.29 DD1.31 DD1.40 DD1.42 XP1. XP2. XP4. XP5. XP6. XP7. XP8. XP9. XP10. XP11. XP12. XP13. XP14. XP15. XP16. XP17.

## Polygon pours and split planes (outlines as drawn)
GND on Top Layer "GND_L01_P000" (solid, pour order 0): -4,4.375 44,4.375 44,-42.575 cw(c40.872,-42.372) 41.075,-45.5 -1,-45.5 cw(c-1,-42.5) -4,-42.5
GND on Bottom Layer "GND_L02_P001" (solid, pour order 1): -4,4.375 44,4.375 44,-42.575 cw(c40.872,-42.372) 41.075,-45.5 -1,-45.5 cw(c-1,-42.5) -4,-42.5

## Keep-outs
Top Layer:
  lines w0.2: 44,-42.575 44,4.625
Keep-Out Layer:
  lines w0.2: -4,-42.5 -4,4.625 ; -3.996,-42.575 ccw(c-1.036,-42.539) -1,-45.5 41.075,-45.5 ; 41.004,-45.5 ccw(c41.039,-42.539) 44,-42.575 ; 44,-42.5 44,4.625

## Silkscreen, mask and mechanical layers (free items; w line width, h text height)
Top Overlay:
  text "M3" at 0.756,3.075 h3
  text "M3" at 40.906,3.075 h3
  text "LED" at 5.2,-3.95 h2 r90
  text "in 6" at 41.5,-6.125 h2 r270
  text "in 1" at -1.5,-10.275 h2 r90
  text "in 7" at 41.5,-12.706 h2 r270
  text "in 2" at -1.5,-16.856 h2 r90
  text "in 8" at 41.5,-19.287 h2 r270
  text "in 3" at -1.5,-23.437 h2 r90
  text "ADC" at 10.95,-24.6 h2
  text "AS5600" at 22.05,-24.65 h2
  text "in 9" at 41.5,-25.869 h2 r270
  text "in 4" at -1.5,-30.019 h2 r90
  text "in 10" at 41.575,-31.775 h2 r270
  text "in 5" at -1.5,-36.6 h2 r90
  text "dental-uint-pedal v1" at 6.95,-39.75 h3 r90
  text "M3" at 34.206,-40.1 h3
  text "M3" at 4.081,-44.625 h3
  text "bat" at 20.2,-44.925 h2
  text "charg" at 12.975,-44.95 h2
  text "on/off" at 26.925,-45 h2
  text "+" at 10.85,-45.075 h3
  text "+" at 17.6,-45.225 h3
Mechanical 3:
  lines w0.2: 41,-45.5 ccw(c41,-42.5) 44,-42.5 ; 41.075,-45.5 -1,-45.5 cw(c-1,-42.5) -4,-42.5 -4,5 cw(c-1,5) -1,8 41.025,8 cw(c41.025,5) 44.025,5 ; 44,-42.575 44,5.025